# Altium PCB FoxSky.TractorVCU.PcbDoc
Units mm, origin at the board's own origin, x right, y up, seen from the top; angles counter-clockwise.
Board outline 79.93 x 48.25 mm, 2 copper layers (Top Layer, Bottom Layer); 110 components, 51 nets, 282 pads, 447 vias.
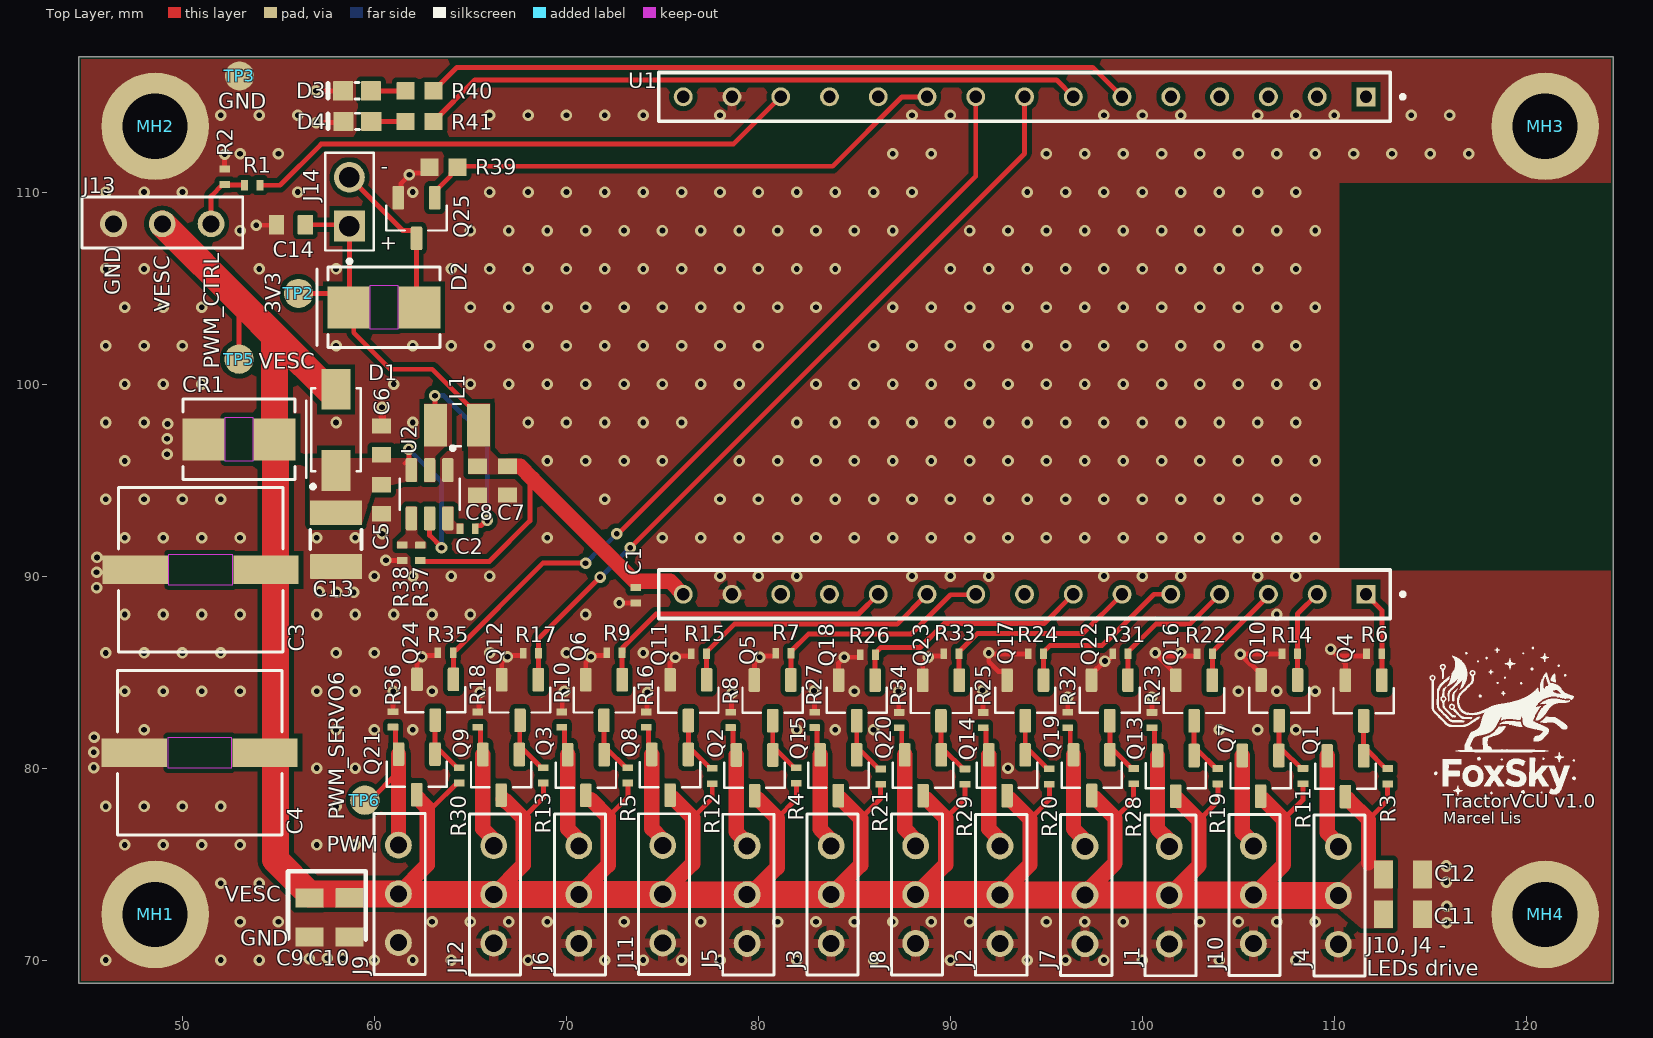
[diagram p0: Top Layer view]
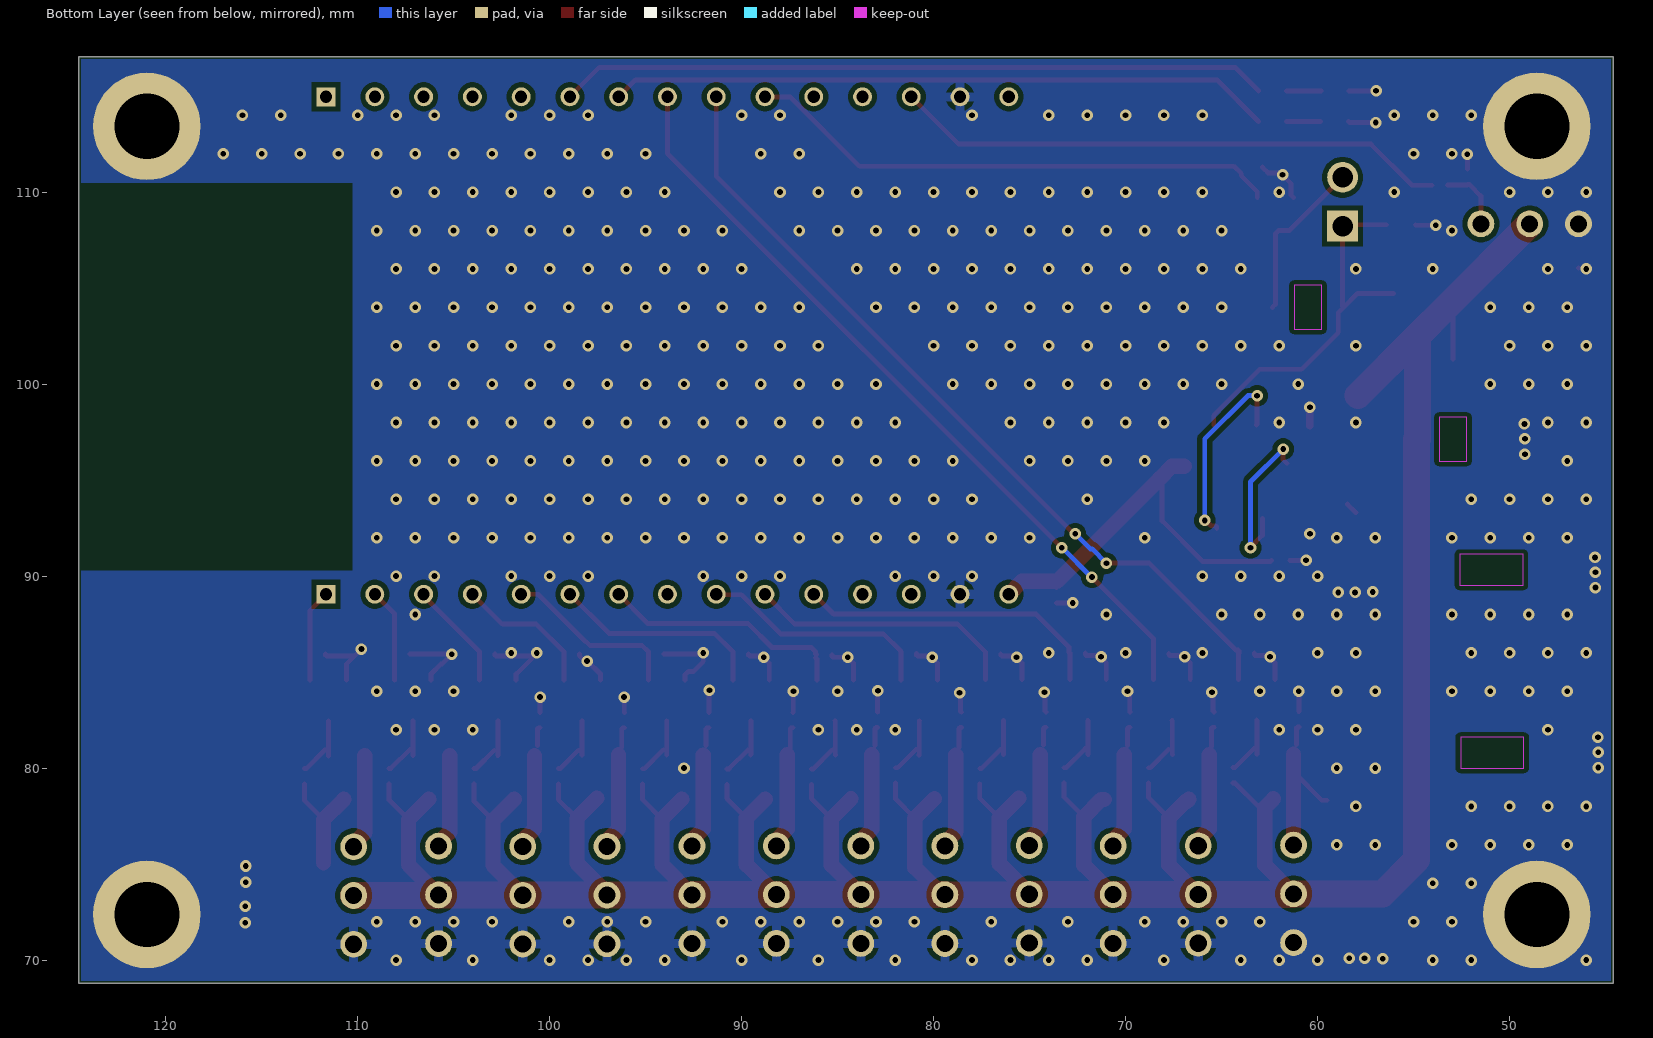
[diagram p1: Bottom Layer view, seen from below]
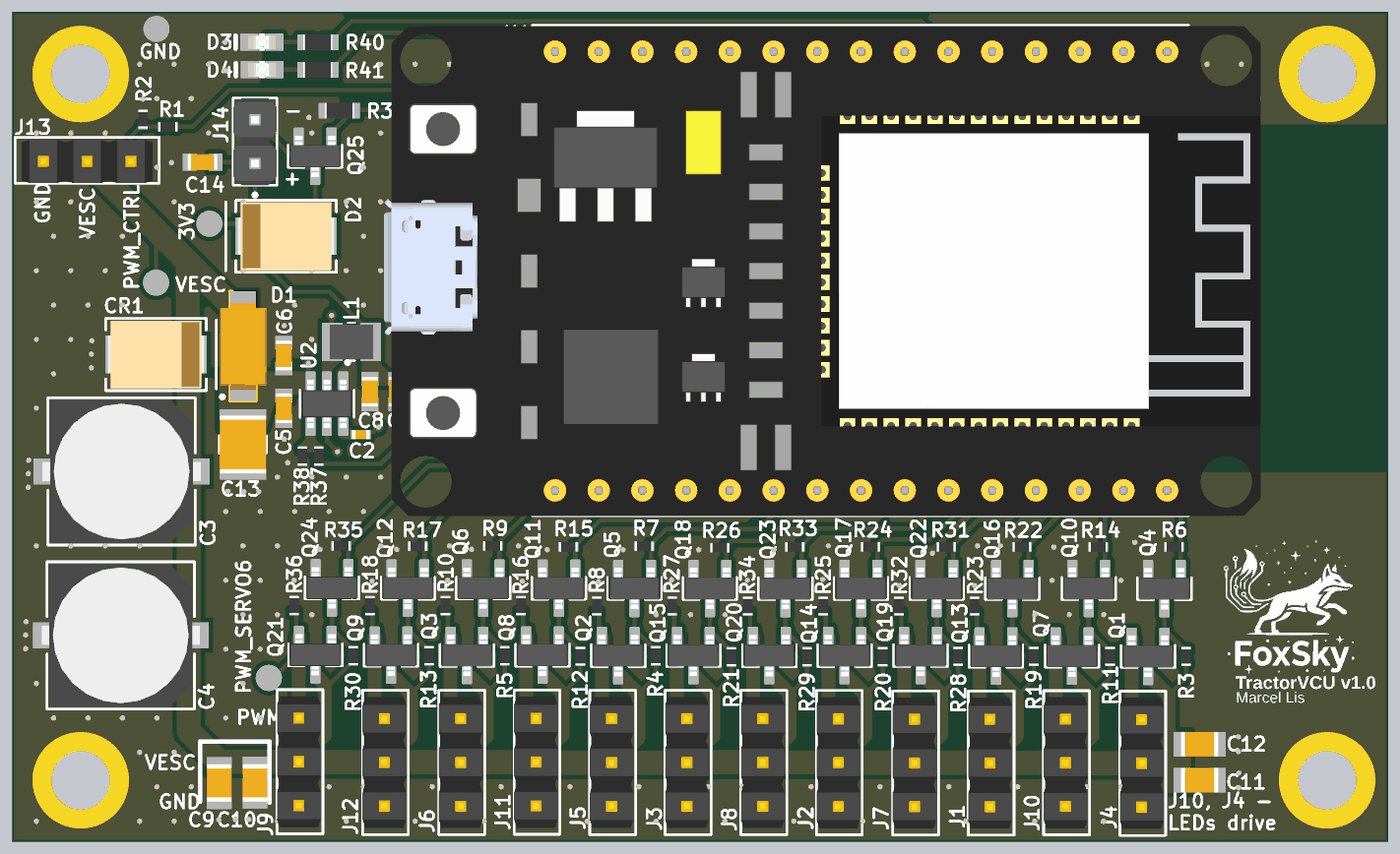
[diagram p2: 3D render of the assembled board from above, using the file's embedded part models]

## Layer stack, top to bottom
Top Solder: solder mask 0.0102, Solder Resist, Dk 3.5
Top Layer: signal copper 0.0356
Dielectric 1: dielectric 0.32, FR-4, Dk 4.8
Bottom Layer: signal copper 0.0356
Bottom Solder: solder mask 0.0102, Solder Resist, Dk 3.5

## Board outline
44.6,68.8 44.6,117.05 124.525,117.05 124.525,68.8

## Design rules (kind name [scope] priority, off if disabled: settings)
Clearance [All] p1: gap=0.254 ignorepadtopadclearanceinfootprint=FALSE
PolygonConnect GND_Reflief [InNet('GND') and (InComponent('U1') or InComponent('J2') or InComponent('J12') or InComponent('J6') or InComponent('J11') or InComponent('J5') or InComponent('J3') or InComponent('J8') or InComponent('J2') or InComponent('J7') or InComponent('J1') or InComponent('J10') or InComponent('J4'))] p1: thpad.connectstyle=Relief thpad.reliefconductorwidth=0.5 thpad.reliefentries=4 thpad.polygonreliefangle="90 Angle" thpad.airgapwidth=0.254 smdpad.connectstyle=Relief smdpad.reliefconductorwidth=0.254 smdpad.reliefentries=4 smdpad.polygonreliefangle="90 Angle" smdpad.airgapwidth=0.254 via.connectstyle=Relief via.reliefconductorwidth=0.254 via.reliefentries=4 via.polygonreliefangle="90 Angle" via.airgapwidth=0.254
PolygonConnect [All] p2: connectstyle=Direct reliefconductorwidth=0.254 reliefentries=4 polygonreliefangle="90 Angle" airgapwidth=0.254
RoutingVias [All] p1: holewidth=0.3 width=0.6 viastyle="Through Hole" minholewidth=0.3 minwidth=0.6 maxholewidth=0.4 maxwidth=0.8
SolderMaskExpansion ViaTenting [IsVia] p1: expansion=0 istentingtop=TRUE
SolderMaskExpansion [All] p2: expansion=0 istentingtop=FALSE
SupplyNets "Schematic Supply Nets_3" [InNet('+3V3')] p1: voltage=0.000
SupplyNets "Schematic Supply Nets_2" [InNet('+V_ESC')] p2: voltage=0.000
SupplyNets "Schematic Supply Nets_1" [InNet('GND')] p3: voltage=0.000
SupplyNets "Schematic Supply Nets" [InNet('+V_BUCK')] p4: voltage=0.000
Width [All] p1: maxlimit=0.254 minlimit=0.254 preferedwidth=0.254
30 further rules are at their usual default settings.

## Classes and differential pairs
component class Tractor2000: J1 J2 J3 J4 J5 J6 J7 J8 J9 J10 J11 J12 J13 MH1 MH2 MH3 MH4
component class Designator: Q1 Q2 Q3 Q4 Q5 Q6 Q7 Q8 Q9 Q10 Q11 Q12 Q13 Q14 Q15 Q16 Q17 Q18 Q19 Q20 Q21 Q22 Q23 Q24 R3 R4 R5 R6 R7 R8 R9 R10 R11 R12 R13 R14 R15 R16 R17 R18 R19 R20 R21 R22 R23 R24 R25 R26 R27 R28 R29 R30 R31 R32 R33 R34 R35 R36 TP2

## Components (designator, comment, footprint, x,y, rotation, side; value= is the part's Value field where it differs from the comment)
C1 "100n" C0402 73.6,89 r90 top
C2 "100n" C0402 64.85,92.475 r180 top
C3 "220u" CAP_PC_8X10_NCH 50.95,90.325 r180 top
C4 "220u" CAP_PC_8X10_NCH 50.9,80.8 r180 top
C5 "10u" C0603 60.373,94 r90 top
C6 "100n" C0603 60.375,97.065 r270 top
C7 "22u" C0603 66.938,94.972 r90 top
C8 "22u" C0603 65.375,94.965 r90 top
C9 "10u" C0805 56.616,72.221 r90 top
C10 "10u" C0805 58.7,72.225 r90 top
C11 "10u" C0805 113.57,72.383 r180 top
C12 "10u" C0805 113.573,74.464 r180 top
C13 "47u" C1210 58,91.9 r90 top
C14 "1u" C0603 55.65,108.3 r0 top
CR1 "SMBJ7.0A" SMBJSERIES_LTF 52.95,97.125 r180 top
D1 "SS14" DIOM4325X250N 58,97.615 r90 top
D2 "1N4148WT" SMBJSERIES_LTF 60.5,104 r0 top
D3 "LED0603" LED0603 59.096,115.275 r0 top
D4 "LED0603" LED0603 59.11,113.682 r0 top
J1 "HTSW-103-24-T-S" CON3_1X3_TU_TSW_SAI 101.4,73.375 r270 top
J2 "HTSW-103-24-T-S" CON3_1X3_TU_TSW_SAI 92.582,73.399 r270 top
J3 "HTSW-103-24-T-S" CON3_1X3_TU_TSW_SAI 83.791,73.407 r270 top
J4 "HTSW-103-24-T-S" CON3_1X3_TU_TSW_SAI 110.206,73.363 r270 top
J5 "HTSW-103-24-T-S" CON3_1X3_TU_TSW_SAI 79.413,73.405 r270 top
J6 "HTSW-103-24-T-S" CON3_1X3_TU_TSW_SAI 70.646,73.41 r270 top
J7 "HTSW-103-24-T-S" CON3_1X3_TU_TSW_SAI 97.012,73.386 r270 top
J8 "HTSW-103-24-T-S" CON3_1X3_TU_TSW_SAI 88.192,73.41 r270 top
J9 "HTSW-103-24-T-S" CON3_1X3_TU_TSW_SAI 61.25,73.45 r270 top
J10 "HTSW-103-24-T-S" CON3_1X3_TU_TSW_SAI 105.78,73.394 r270 top
J11 "HTSW-103-24-T-S" CON3_1X3_TU_TSW_SAI 75.016,73.429 r270 top
J12 "HTSW-103-24-T-S" CON3_1X3_TU_TSW_SAI 66.216,73.415 r270 top
J13 "HTSW-103-24-T-S" CON3_1X3_TU_TSW_SAI 48.95,108.35 r0 top
J14 "GoldPin 2x1" HARWIN_M20-9990246 58.7,109.5 r90 top
L1 "MAMK2520T3R3M" INDC2520X120N 64.3,97.865 r0 top
MH1 "M3 Plated Hole" "M3 Plated Hole" 48.575,72.375 r0 top
MH2 "M3 Plated Hole" "M3 Plated Hole" 48.575,113.425 r0 top
MH3 "M3 Plated Hole" "M3 Plated Hole" 120.975,113.425 r0 top
MH4 "M3 Plated Hole" "M3 Plated Hole" 120.975,72.375 r0 top
Q1 "AO3401" SOT95P240X111-3N 110.575,79.575 r270 top
Q2 "AO3401" SOT95P240X111-3N 79.799,79.623 r270 top
Q3 "AO3401" SOT95P240X111-3N 71.012,79.636 r270 top
Q4 "BSS138" SOT95P240X111-3N 111.525,83.515 r270 top
Q5 "BSS138" SOT95P240X111-3N 80.743,83.528 r270 top
Q6 "BSS138" SOT95P240X111-3N 71.955,83.546 r270 top
Q7 "AO3401" SOT95P240X111-3N 106.16,79.595 r270 top
Q8 "AO3401" SOT95P240X111-3N 75.4,79.65 r270 top
Q9 "AO3401" SOT95P240X111-3N 66.601,79.647 r270 top
Q10 "BSS138" SOT95P240X111-3N 107.13,83.526 r270 top
Q11 "BSS138" SOT95P240X111-3N 76.352,83.538 r270 top
Q12 "BSS138" SOT95P240X111-3N 67.583,83.544 r270 top
Q13 "AO3401" SOT95P240X111-3N 101.74,79.593 r270 top
Q14 "AO3401" SOT95P240X111-3N 92.95,79.625 r270 top
Q15 "AO3401" SOT95P240X111-3N 84.167,79.628 r270 top
Q16 "BSS138" SOT95P240X111-3N 102.692,83.52 r270 top
Q17 "BSS138" SOT95P240X111-3N 93.9,83.525 r270 top
Q18 "BSS138" SOT95P240X111-3N 85.126,83.524 r270 top
Q19 "AO3401" SOT95P240X111-3N 97.362,79.63 r270 top
Q20 "AO3401" SOT95P240X111-3N 88.577,79.626 r270 top
Q21 "AO3401" SOT95P240X111-3N 62.205,79.671 r270 top
Q22 "BSS138" SOT95P240X111-3N 98.3,83.525 r270 top
Q23 "BSS138" SOT95P240X111-3N 89.511,83.519 r270 top
Q24 "BSS138" SOT95P240X111-3N 63.167,83.56 r270 top
Q25 "BSS138" SOT95P240X111-3N 62.191,108.65 r270 top
R1 "1k" R0402 53.636,110.361 r180 top
R2 "10k" R0402 52.2,110.8 r270 top
R3 "2k2" R0402 112.775,79.575 r270 top
R4 "2k2" R0402 81.977,79.615 r270 top
R5 "2k2" R0402 73.204,79.618 r270 top
R6 "10k" R0402 112.075,85.95 r0 top
R7 "10k" R0402 81.3,85.975 r0 top
R8 "10k" R0402 78.549,82.508 r270 top
R9 "10k" R0402 72.5,86 r0 top
R10 "10k" R0402 69.767,82.524 r270 top
R11 "2k2" R0402 108.367,79.581 r270 top
R12 "2k2" R0402 77.597,79.584 r270 top
R13 "2k2" R0402 68.804,79.619 r270 top
R14 "10k" R0402 107.675,85.95 r0 top
R15 "10k" R0402 76.9,85.95 r0 top
R16 "10k" R0402 74.15,82.525 r270 top
R17 "10k" R0402 68.15,85.975 r0 top
R18 "10k" R0402 65.38,82.526 r270 top
R19 "2k2" R0402 103.936,79.576 r270 top
R20 "2k2" R0402 95.156,79.565 r270 top
R21 "2k2" R0402 86.367,79.552 r270 top
R22 "10k" R0402 103.25,85.95 r0 top
R23 "10k" R0402 100.5,82.5 r270 top
R24 "10k" R0402 94.45,85.95 r0 top
R25 "10k" R0402 91.706,82.499 r270 top
R26 "10k" R0402 85.7,85.9 r0 top
R27 "10k" R0402 82.925,82.509 r270 top
R28 "2k2" R0402 99.543,79.58 r270 top
R29 "2k2" R0402 90.76,79.556 r270 top
R30 "2k2" R0402 64.407,79.621 r270 top
R31 "10k" R0402 98.85,85.95 r0 top
R32 "10k" R0402 96.103,82.503 r270 top
R33 "10k" R0402 90.05,85.95 r0 top
R34 "10k" R0402 87.325,82.5 r270 top
R35 "10k" R0402 63.7,86 r0 top
R36 "10k" R0402 60.968,82.537 r270 top
R37 "33k" R0402 62.398,91.214 r270 top
R38 "10k" R0402 61.45,91.215 r90 top
R39 "10k" R0603 63.6,111.3 r0 top
R40 "330R" R0603 62.35,115.275 r0 top
R41 "330R" R0603 62.35,113.677 r0 top
TP2 "TP" TP 56.05,104.725 r90 top
TP3 "TP" TP 52.975,116.05 r90 top
TP5 "TP" TP 52.95,101.3 r90 top
TP6 "TP" TP 59.5,78.325 r90 top
U1 "NodeMCU-32" NODEMCU-32 92.325,101.625 r270 top
U2 "TPS562201DDCR" SOT95P280X110-6N 62.875,94.265 r270 top

## Footprints (in the part's own frame and the unit in brackets; to place one, negate y for a bottom-side part, rotate by r counter-clockwise, add the part's x,y. Pads: shape width x height; smd on the part's side, far side on the other; paste and mask are expansions set on the pad)
C0402 [mm] "Generic 0402 SMD Ceramic Capacitor Footprint"
  rrect5% 0.355x0.55 smd: 1(-0.4,0) 2(0.4,0)
  body extent -0.53,-0.28 0.53,0.28, height 0.55
C0603 [mm] "Generic 0603 SMD Ceramic Capacitor Footprint"
  rrect5% 0.8x1 smd: 1(-0.75,0) 2(0.75,0)
  body extent -0.87,-0.48 0.87,0.48, height 0.95
C0805 [mm] "Generic 0805 SMD Ceramic Capacitor Footprint"
  rrect5% 1x1.45 smd: 1(-1.016,0) 2(1.016,0)
  body extent -1.1,-0.72 1.1,0.72, height 1.45
C1210 [mm] "Generic 1210 SMD Ceramic Capcitor Footprint"
  rrect5% 1.3x2.7 smd: 1(-1.4,0) 2(1.4,0)
  silkscreen extent -0.5,-1.33 0.5,1.34, body extent -1.7,-1.35 1.7,1.35, height 2.8
CAP_PC_8X10_NCH [mil]
  rect 134x59 smd paste+0 mask+0: 1(-134,0) 2(134,0)
  Keep-Out Layer region: -65,-31.5 -65,31.5 65,31.5 65,-31.5
  silkscreen extent -169,-169 169,169, body extent -181,-164 181,164, height 396
CON3_1X3_TU_TSW_SAI [mil]
  round 55 hole 35 paste-99999 mask+0: 1(-100,0) 2(0,0) 3(100,0)
  silkscreen extent -165,-50 165,55, body extent -150,-50 150,50, height 500
DIOM4325X250N [mm]
  rect 2.12x1.5 smd paste+0 mask+0.102: A(2.115,0) C(-2.115,0)
  silkscreen extent -3.05,-1.28 2.16,1.3, body extent -2.56,-1.36 2.49,1.34, height 2.37
HARWIN_M20-9990246 [mm]
  rect 1.605x1.605 / inner round 1.605 / far side rect 1.605x1.605 hole 1.07: 1(-1.27,0)
  round 1.605 hole 1.07: 2(1.27,0)
  silkscreen extent -3.2,-1.27 2.54,1.27, body extent -2.54,-1.27 2.54,1.27, height 8.74
INDC2520X120N [mm]
  rect 1.2x2.22 smd: 1(-1.11,0) 2(1.11,0)
  silkscreen extent -0.19,-1.1 0.19,1.1, body extent -1.25,-1 1.25,1, height 1.2
LED0603 [mm] "0603 LED footprint"
  rrect5% 1.05x1 smd: A(0.725,0) K(-0.725,0)
  silkscreen extent -1.52,-0.42 0.11,0.43, body extent -0.81,-0.41 0.81,0.41, height 0.95
"M3 Plated Hole" [mm]
  round 5.6 hole 3.4 mask+0: 1(0,0)
NODEMCU-32 [mm]
  rect 0.985x0.985 / inner round 0.985 / far side rect 0.985x0.985 hole 0.635: 01(-13.339,19.318) 16(12.571,19.318)
  round 0.985 hole 0.635: 02(-13.339,16.778) 03(-13.339,14.238) 04(-13.339,11.698) 05(-13.339,9.158) 06(-13.339,6.618) 07(-13.339,4.078) 08(-13.339,1.538) 09(-13.339,-1.002) 10(-13.339,-3.542) 11(-13.339,-6.082) 12(-13.339,-8.622) 13(-13.339,-11.162) 14(-13.339,-13.702) 15(-13.339,-16.242) 17(12.571,16.778) 18(12.571,14.238) 19(12.571,11.698) 20(12.571,9.158) 21(12.571,6.618) 22(12.571,4.078) 23(12.571,1.538) 24(12.571,-1.002) 25(12.571,-3.542) 26(12.571,-6.082) 27(12.571,-8.622) 28(12.571,-11.162) 29(12.571,-13.702) 30(12.571,-16.242)
  silkscreen extent -14.61,-17.51 13.84,21.34, body extent -14.6,-26.13 13.9,24.8, height 6.8
R0402 [mm] "Generic 0402 Resistor Footprint"
  rrect5% 0.35x0.55 smd: 1(-0.4,0) 2(0.4,0)
  body extent -0.53,-0.28 0.53,0.28, height 0.37
R0603 [mm] "Generic 0603 Resistor Footprint"
  rrect5% 0.95x0.9 smd: 1(-0.725,0) 2(0.725,0)
  body extent -0.85,-0.45 0.85,0.45, height 0.55
SMBJSERIES_LTF [mil]
  rect 86x86 smd paste+0 mask+0: 1(-73,0) 2(73,0)
  Keep-Out Layer region: -28,-45 -28,45 28,45 28,-45
  silkscreen extent -138,-83 115,83, body extent -110,-77 110,77, height 98
SOT95P240X111-3N [mm]
  rrect25% 1.23x0.6 smd: 1(-1.06,0.95) 2(-1.06,-0.95) 3(1.06,0)
  silkscreen extent -0.65,-1.57 0.65,1.57, body extent -1.2,-1.45 1.2,1.45, height 1.11
SOT95P280X110-6N [mm]
  rrect25% 1.25x0.59 smd: 1(-1.255,0.95) 2(-1.255,0) 3(-1.255,-0.95) 4(1.255,-0.95) 5(1.255,0) 6(1.255,0.95)
  silkscreen extent -2.5,-1.57 0.8,1.57, body extent -1.4,-1.45 1.4,1.45, height 1.1
TP [mil]
  round 60 smd: 1(0,0)

## Part data
C1 C2: library part CMP-00023-15, "Generic SMD 0402 Ceramic Capacitor"
C3 C4: library part PCJ1C221MCL4GS, "No Description Available", Manufacturer_Name=Nichicon, Copyright="Copyright (C) 2026 Ultra Librarian. All rights reserved.", Manufacturer_Part_Number=PCJ1C221MCL4GS
C5 C6 C7 C8 C14: library part CMP-00024-8, "Generic 0603 SMD Ceramic Capacitor"
C9 C10 C11 C12: library part CMP-00025-5, "Generic 0805 SMD Ceramic Capacitor"
C13: library part CMP-00027-6, "Generic 1210 SMD Ceramic Capacitor"
CR1: "Description", Manufacturer_Name="Littelfuse Inc", Copyright="Copyright (C) 2025 Ultra Librarian. All rights reserved.", Manufacturer_Part_Number=SMBJ7.0A
D1: "1A, 40V, Schottky Rectifier", Package="SMA-2 Taiwan Semiconductor", Check_prices=https://www.snapeda.com/parts/SS14/taiwan/view-part/?ref=eda, MF="Taiwan Semiconductor", MP=SS14, SnapEDA_Link=https://www.snapeda.com/parts/SS14/taiwan/view-part/?ref=snap
D2: "Description", Manufacturer_Name="Littelfuse Inc", Manufacturer_Part_Number=SMBJ7.0A, Copyright="Copyright (C) 2025 Ultra Librarian. All rights reserved."
D3 D4: library part CMP-00036-7, "0603 LED"
J1 J2 J3 J4 J5 J6 J7 J8 J9 J10 J11 J12 J13: "Description", Manufacturer_Name="Samtec Inc", Copyright="Copyright (C) 2026 Ultra Librarian. All rights reserved.", Manufacturer_Part_Number=HTSW-103-24-T-S, RefDes=RefDes, Type=Type
J14: "2.54mm (0.1) Pitch SIL Vertical Throughboard Pin Header, 6.1mm mating pin height, tin, 2 contacts", Package=None, Check_prices=https://www.snapeda.com/parts/M20-9990246/Harwin/view-part/?ref=eda, MF=Harwin, MP=M20-9990246, SnapEDA_Link=https://www.snapeda.com/parts/M20-9990246/Harwin/view-part/?ref=snap
L1: "3.3 ÂµH Shielded Drum Core, Wirewound Inductor 1.7 A 156mOhm Max 1008 (2520 Metric)", Package="2520 Taiyo Yuden", Check_prices=https://www.snapeda.com/parts/MAMK2520T3R3M/Taiyo+Yuden/view-part/?ref=eda, MF="Taiyo Yuden", MP=MAMK2520T3R3M, SnapEDA_Link=https://www.snapeda.com/parts/MAMK2520T3R3M/Taiyo+Yuden/view-part/?ref=snap
MH1 MH2 MH3 MH4: library part CONN-00039-2
Q1 Q2 Q3 Q7 Q8 Q9 Q13 Q14 Q15 Q19 Q20 Q21: "P-Channel 30 V 4A Surface Mount SOT-23-3", Package="SOT-23-3 ON Semiconductor", Check_prices=https://www.snapeda.com/parts/BSS138/Onsemi/view-part/?ref=eda, MF=onsemi, MP=BSS138, SnapEDA_Link=https://www.snapeda.com/parts/BSS138/Onsemi/view-part/?ref=snap
Q4 Q5 Q6 Q10 Q11 Q12 Q16 Q17 Q18 Q22 Q23 Q24 Q25: "N-Channel 50 V 220mA (Ta) 350mW (Ta) Surface Mount SOT-23-3", Package="SOT-23-3 ON Semiconductor", Check_prices=https://www.snapeda.com/parts/BSS138/Onsemi/view-part/?ref=eda, MF=onsemi, MP=BSS138, SnapEDA_Link=https://www.snapeda.com/parts/BSS138/Onsemi/view-part/?ref=snap
R1 R2 R3 R4 R5 R6 R7 R8 R9 R10 R11 R12 R13 R14 R15 R16 R17 R18 R19 R20 R21 R22 R23 R24 R25 R26 R27 R28 R29 R30 R31 R32 R33 R34 R35 R36 R37 R38: library part CMP-00016-11, "Generic 0402 SMD Resistor"
R39 R40 R41: library part CMP-00017-10, "Generic 0603 SMD Resistor"
U1: Package=None, Availability=Unavailable, MF="Samtec Inc.", MP=TS-115-T-A, Price=None
U2: "4.5 V to 17 V input, 2 A output, synchronous step-down converter in Eco-mode", Package="SOT-23-THN-6 Texas Instruments", Check_prices=https://www.snapeda.com/parts/TPS562201DDCR/Texas+Instruments/view-part/?ref=eda, MF="Texas Instruments", MP=TPS562201DDCR, SnapEDA_Link=https://www.snapeda.com/parts/TPS562201DDCR/Texas+Instruments/view-part/?ref=snap

## Via types
v1: diameter 0.6, hole 0.3, Top Layer to Bottom Layer, tented both sides, 447 vias

## Nets (pads, with @x,y where several pads share a name; then routed paths per layer and width w, separated by ;. In a path a pad name is that pad's centre, name@x,y a point inside that pad or via, vN(x,y) a via of type N, cw(c..) or ccw(c..) an arc to the next point about the centre after c; other vN are vias at no path point)
+3V3: C1.2 C7.2 C8.2 C14.2 D2.1 J14.1 L1.2 R37.2 TP2.1 U1.30 | length 40.5
  Top Layer w0.254: TP2.1 57.921,104.725 D2.1 ; C14.2 58.63,108.3 J14.1 58.7,104.054 D2.1 ; R37.2 62.445,90.767 65.992,90.767 68.1,92.875 68.1,94.925 68.242,95.067 ; L1.2 65.41,98.375 63.011,100.774 60.826,100.774 58.924,102.676 58.924,103.721 D2.1 ; C1.2@73.549,89.45 C1.2
  Top Layer w0.8: C7.2 67.587,95.722 68.242,95.067 73.584,89.725 75.412,89.725 U1.30
+V_BUCK: C5.2 C6.2 C13.2 D1.C U2.3 U2.5 | length 9.1
  Top Layer w0.254: C13.2 C13.2@58.45,93.75 ; 61.6,95.875 61.792,96.067 v1(61.792,96.615) ; U2.5 62.875,92.121 63.494,91.502 v1(63.494,91.476)
  Bottom Layer w0.254: v1(61.792,96.615) 63.494,94.913 v1(63.494,91.476)
+V_ESC: C3.1 C4.1 C9.2 C10.2 C11.2 C12.2 CR1.1 D1.A J1.2 J2.2 J3.2 J4.2 J5.2 J6.2 J7.2 J8.2 J9.2 J10.2 J11.2 J12.2 J13.2 Q1.3 Q2.3 Q3.3 Q7.3 Q8.3 Q9.3 Q13.3 Q14.3 Q15.3 Q19.3 Q20.3 Q21.3 R3.2 R4.2 R5.2 R11.2 R12.2 R13.2 R19.2 R20.2 R21.2 R28.2 R29.2 R30.2 TP5.1 | length 196.5
  Top Layer w0.254: TP5.1 52.95,103.725 53.262,104.038 ; D1.A@57.42,100.31 D1.A ; 62.75,77.95 63.037,77.95 64.307,79.221 R30.2 ; 67.75,77.4 68.804,78.454 R13.2 ; 72.175,77.46 73.204,78.489 R5.2 ; 76.575,77.415 77.597,78.437 R12.2 ; 80.975,77.388 81.977,78.39 R4.2 ; 85.325,77.375 86.367,78.417 R21.2 ; 89.75,77.4 90.76,78.41 R29.2 ; 94.15,77.35 95.156,78.356 R20.2 ; 98.574,77.392 99.543,78.361 R28.2 ; 102.95,77.275 103.936,78.261 R19.2 ; 107.35,77.325 108.367,78.342 R11.2 ; 111.775,77.315 112.775,78.315 R3.2
  Top Layer w0.8: J9.2 62.75,74.95 62.75,77.95 Q21.3@62.305,78.396 ; J12.2 67.75,74.949 67.75,77.4 66.878,78.272 66.801,78.272 Q9.3@66.701,78.372 ; J6.2 72.175,74.939 72.175,77.46 71.274,78.361 Q3.3@71.112,78.361 ; J11.2 75.016,73.462 76.575,75.021 76.575,77.415 Q8.3@75.558,78.432 ; J5.2 79.562,73.405 79.564,73.407 80.975,74.818 80.975,77.388 Q2.3@79.956,78.406 ; J3.2 85.325,74.941 85.325,77.375 Q15.3@84.3,78.4 ; J8.2 89.75,74.968 89.75,77.4 Q20.3@88.775,78.375 ; J2.2 94.15,74.967 94.15,77.35 Q14.3@93.125,78.375 ; J7.2 97.012,73.481 98.574,75.043 98.574,77.392 Q19.3@97.546,78.421 ; J1.2 102.95,74.926 102.95,77.275 Q13.3@101.85,78.375 ; J10.2 107.35,74.964 107.35,77.325 Q7.3@106.3,78.375 ; Q1.3@110.72,78.37 111.775,77.315 111.775,75.075
  Top Layer w1.4: J13.2 53.262,104.038 54.804,102.496 ; CR1.1 54.804,102.496 ; C4.1@54.85,80.8 54.85,75.225 56.625,73.45 J9.2 ; C4.1@54.85,80.849 CR1.1@54.85,97.125 ; D1.A@57.896,99.404 54.804,102.496 ; J9.2@61.285,73.415 J12.2 J6.2@70.641,73.415 ; J6.2 J11.2@74.998,73.41 ; J11.2@75.04,73.405 J5.2 ; J5.2 79.564,73.407 J3.2 ; J3.2@83.794,73.41 J8.2 J2.2@92.572,73.41 ; J2.2 J7.2@96.999,73.399 ; J7.2 J1.2@101.388,73.386 ; J1.2@101.418,73.394 J10.2 ; J10.2@105.811,73.363 J4.2
BACK_LIGHT: J10.1 Q7.2 | length 5
  Top Layer w0.4: J10.1 J10.1@105.78,76.097
  Top Layer w0.8: Q7.2 105.21,76.667 J10.1@105.78,76.097
BUZZER: Q25.1 R39.2 U1.10 | length 28.1
  Top Layer w0.254: Q25.1 63.141,110.025 63.977,110.861 63.977,110.977 64.3,111.3 R39.2 64.375,111.35 83.864,111.35 87.478,114.964 U1.10
FRONT_LIGHT: J4.1 Q1.2 | length 5
  Top Layer w0.4: J4.1 J4.1@110.206,76.054
  Top Layer w0.8: Q1.2 109.625,76.636 J4.1@110.206,76.054
GND: C1.1 C3.2 C4.2 C5.1 C6.1 C7.1 C8.1 C9.1 C10.1 C11.1 C12.1 C13.1 C14.1 CR1.2 D3.K D4.K J1.3 J2.3 J3.3 J4.3 J5.3 J6.3 J7.3 J8.3 J9.3 J10.3 J11.3 J12.3 J13.1 MH1.1 MH2.1 MH3.1 MH4.1 Q4.2 Q5.2 Q6.2 Q10.2 Q11.2 Q12.2 Q16.2 Q17.2 Q18.2 Q22.2 Q23.2 Q24.2 Q25.2 R2.1 R6.1 R7.1 R8.1 R9.1 R10.1 R14.1 R15.1 R16.1 R17.1 R18.1 R22.1 R23.1 R24.1 R25.1 R26.1 R27.1 R31.1 R32.1 R33.1 R34.1 R35.1 R36.1 R38.1 R39.1 TP3.1 U1.14 U1.29 U2.1 | length 53.5
  Top Layer w0.254: 46.4,106.05 46.405,106.055 ; J13.1@46.405,108.345 J13.1 ; R2.1 v1(52.2,111.975) ; v1(53.85,108.275) 54.875,108.275 C14.1 ; v1(56.95,115.274) D3.K ; v1(56.975,113.625) 58.328,113.625 D4.K ; C6.1 C6.1@60.4,97.84 ; v1(60.6,90.825) 60.605,90.82 61.445,90.82 R38.1 ; R36.1 60.971,82.94 60.971,83.996 v1(60.975,84) ; Q25.2 61.389,109.858 61.389,110.464 v1(61.825,110.9) 61.919,110.9 62.018,110.999 62.574,110.999 R39.1 ; Q24.2 62.217,85.491 62.475,85.749 v1(62.475,85.8) 62.541,85.866 63.252,85.866 63.3,85.914 R35.1 ; R18.1 65.392,82.926 65.44,82.974 65.44,83.89 v1(65.5,83.95) ; Q12.2 66.633,85.491 66.925,85.783 v1(66.925,85.8) 66.991,85.866 67.702,85.866 67.75,85.914 R17.1 ; R10.1 69.767,82.955 69.783,82.972 69.783,83.79 69.9,83.906 v1(69.9,84) ; Q6.2 71.005,85.491 71.275,85.761 v1(71.275,85.8) 71.341,85.866 72.052,85.866 72.1,85.914 R9.1 ; v1(72.75,88.6) C1.1 ; R16.1 74.187,82.963 74.187,83.912 v1(74.225,83.95) ; Q11.2 75.402,85.466 75.675,85.739 v1(75.675,85.775) 75.741,85.841 76.452,85.841 76.5,85.889 R15.1 ; R8.1 78.552,82.908 78.6,82.956 78.6,83.875 v1(78.65,83.925) ; Q5.2 79.793,85.466 80.075,85.749 v1(80.075,85.775) 80.141,85.841 80.852,85.841 80.9,85.889 R7.1 ; v1(82.9,84.025) 82.912,84.013 82.912,82.922 R27.1 ; Q18.2 84.176,85.466 84.475,85.765 v1(84.475,85.775) 85.252,85.775 85.3,85.823 R26.1 ; v1(87.3,84) 87.312,83.988 87.312,82.913 R34.1 ; Q23.2 88.561,85.466 88.85,85.755 v1(88.85,85.775) 88.916,85.841 89.602,85.841 89.65,85.889 R33.1 ; v1(91.675,84.05) 91.691,84.034 91.691,82.914 R25.1 ; Q17.2 92.95,84.863 92.777,85.036 92.499,85.036 91.995,85.54 91.995,85.895 92.05,85.95 R24.1 ; R32.1 96.114,82.914 96.114,83.689 v1(96.125,83.7) ; Q22.2 97.35,84.9 98.025,85.575 v1(98.05,85.575) 98.116,85.641 98.241,85.641 98.45,85.85 R31.1 ; R23.1 v1(100.5,83.7) ; v1(100.675,86) v1@100.834,85.841 ; Q16.2 101.742,84.895 100.834,85.803 v1@100.834,85.841 ; R22.1 102.85,85.889 102.802,85.841 v1@100.834,85.841 ; Q10.2 106.18,84.901 105.652,85.43 105.595,85.43 v1(105.1,85.925) 105.113,85.938 107.263,85.938 R14.1 ; v1(109.8,86.2) 110.159,85.841 ; Q4.2 110.575,85.425 110.159,85.841 ; R6.1 111.675,85.889 111.627,85.841 110.159,85.841
  Top Layer w0.4: C6.1@60.4,97.84 v1(60.4,98.8)
  other v1: 46,70 52,70 54,70 60,70 62,70 64,70 68,70 72,70 74,70 76,70 78,70 82,70 86,70 90,70 94,70 96,70 98,70 100,70 104,70 108,70 56.6,70.075 57.55,70.1 58.35,70.1 115.851,71.948 53,72 55,72 63,72 65,72 67,72 69,72 73,72 77,72 81,72 83,72 85,72 87,72 89,72 91,72 95,72 97,72 99,72 103,72 105,72 107,72 109,72 115.851,72.798 52,74 54,74 115.825,74.05 115.825,74.9 47,76 49,76 51,76 53,76 57,76 59,76 46,78 48,78 50,78 52,78 58,78 57,80 59,80 93,80 45.375,80.025 45.375,80.825 45.4,81.6 48,82 58,82 60,82 62,82 82,82 84,82 86,82 104,82 106,82 108,82 47,84 49,84 51,84 53,84 57,84 59,84 63,84 85,84 105,84 107,84 109,84 46,86 48,86 50,86 52,86 58,86 60,86 66,86 70,86 74,86 92,86 102,86 47,88 49,88 51,88 53,88 57,88 59,88 61,88 63,88 65,88 71,88 107,88 58.048,89.149 58.925,89.15 57.125,89.175 45.525,89.4 60,90 62,90 64,90 66,90 78,90 80,90 82,90 88,90 90,90 92,90 98,90 100,90 102,90 106,90 108,90 45.525,90.2 45.55,90.975 47,92 49,92 51,92 53,92 57,92 59,92 69,92 75,92 77,92 79,92 81,92 83,92 85,92 87,92 89,92 91,92 93,92 95,92 97,92 99,92 101,92 103,92 105,92 107,92 109,92 60.4,92.2 46,94 48,94 50,94 52,94 72,94 78,94 80,94 82,94 84,94 86,94 88,94 90,94 92,94 94,94 96,94 98,94 100,94 102,94 104,94 106,94 108,94 47,96 69,96 71,96 73,96 75,96 79,96 81,96 83,96 85,96 87,96 89,96 91,96 93,96 95,96 97,96 99,96 101,96 103,96 105,96 107,96 109,96 49.2,96.35 49.2,97.15 49.225,97.925 46,98 48,98 58,98 62,98 68,98 70,98 72,98 74,98 76,98 82,98 84,98 86,98 88,98 90,98 92,98 94,98 96,98 98,98 100,98 102,98 104,98 106,98 108,98 47,100 49,100 51,100 61,100 65,100 67,100 69,100 71,100 73,100 75,100 77,100 79,100 83,100 85,100 87,100 89,100 91,100 93,100 95,100 97,100 99,100 101,100 103,100 105,100 107,100 109,100 46,102 48,102 50,102 58,102 62,102 64,102 66,102 68,102 70,102 72,102 74,102 76,102 78,102 80,102 86,102 88,102 90,102 92,102 94,102 96,102 98,102 100,102 102,102 104,102 106,102 108,102 47,104 49,104 51,104 65,104 67,104 69,104 71,104 73,104 75,104 77,104 79,104 81,104 83,104 87,104 89,104 91,104 93,104 95,104 97,104 99,104 101,104 103,104 105,104 107,104 109,104 46,106 48,106 54,106 58,106 64,106 66,106 68,106 70,106 72,106 74,106 76,106 78,106 80,106 82,106 84,106 90,106 92,106 94,106 96,106 98,106 100,106 102,106 104,106 106,106 108,106 53,108 65,108 67,108 69,108 71,108 73,108 75,108 77,108 79,108 81,108 83,108 85,108 87,108 91,108 93,108 95,108 97,108 99,108 101,108 103,108 105,108 107,108 109,108 46,110 48,110 50,110 56,110 62,110 66,110 68,110 70,110 72,110 74,110 76,110 78,110 80,110 82,110 84,110 86,110 88,110 94,110 96,110 98,110 100,110 102,110 104,110 106,110 108,110 53,112 55,112 87,112 89,112 95,112 97,112 99,112 101,112 103,112 105,112 107,112 109,112 111,112 113,112 115,112 117,112 52,114 54,114 56,114 66,114 68,114 70,114 72,114 74,114 78,114 88,114 90,114 98,114 100,114 102,114 106,114 108,114 110,114 114,114 116,114
LED1: R40.2 U1.06 | length 37
  Top Layer w0.254: R40.2 64.3,116.5 97.407,116.5 U1.06
LED2: R41.2 U1.07 | length 34.6
  Top Layer w0.254: R41.2 65.236,115.838 95.529,115.838 U1.07
MCU_ESC_CONTROL: R1.1 U1.13 | length 29
  Top Layer w0.254: R1.1 55.083,110.361 57.223,112.5 78.699,112.5 U1.13
NetC2_1: C2.1 L1.1 U2.2 | length 10.3
  Top Layer w0.254: v1(63.15,99.399) 63.15,97.905 L1.1 ; C2.1 65.25,92.572 65.3,92.623 65.553,92.623 65.83,92.9 v1(65.875,92.9)
  Bottom Layer w0.254: v1(63.15,99.399) 63.626,99.399 65.875,97.15 v1(65.875,92.9)
NetC2_2: C2.2 U2.6
NetD2_2: D2.2 J14.2 Q25.3 | length 8.6
  Top Layer w0.254: J14.2 61.467,108.003 62.018,108.003 62.191,107.83 Q25.3 62.191,104.163 D2.2
NetD3_A: D3.A R40.1 | length 1.8
  Top Layer w0.254: D3.A R40.1
NetD4_A: D4.A R41.1 | length 1.8
  Top Layer w0.254: D4.A 59.841,113.677 R41.1
NetJ13_3: J13.3 R1.2 R2.2 | length 3.5
  Top Layer w0.254: J13.3 51.49,109.79 52.1,110.4 R2.2 52.22,110.38 53.216,110.38 R1.2
NetQ1_1: Q1.1 Q4.3 R3.1 | length 3.3
  Top Layer w0.254: Q1.1 Q4.3 ; Q1.1@111.7,80.95 112.675,79.975 R3.1
NetQ2_1: Q2.1 Q5.3 R4.1 | length 3.3
  Top Layer w0.254: Q5.3 80.746,82.465 80.746,80.686 Q2.1 Q2.1@80.758,80.675 ; Q2.1@80.908,80.983 81.877,80.015 R4.1
NetQ3_1: Q3.1 Q6.3 R5.1 | length 3.3
  Top Layer w0.254: Q6.3 71.958,82.482 71.958,80.7 Q3.1 ; Q3.1@72.111,81.011 73.104,80.018 R5.1
NetQ4_1: Q4.1 R6.2 U1.16 | length 4.8
  Top Layer w0.254: U1.16 112.475,88.222 R6.2 Q4.1
NetQ5_1: Q5.1 R7.2 U1.24 | length 12.3
  Top Layer w0.254: Q5.1 81.696,84.592 81.696,85.971 R7.2 81.7,86.075 82.6,86.975 87.95,86.975 90.004,89.029 91.298,89.029 U1.24
NetQ6_1: Q6.1 R9.2 U1.26 | length 16.2
  Top Layer w0.254: Q6.1 72.903,84.608 72.903,85.997 R9.2 72.948,86.048 72.948,86.298 74.675,88.025 85.214,88.025 U1.26
NetQ7_1: Q7.1 Q10.3 R11.1 | length 3.3
  Top Layer w0.254: Q7.1 107.12,80.665 107.12,82.456 Q10.3 ; Q7.1@107.287,80.962 108.267,79.981 R11.1
NetQ8_1: Q8.1 Q11.3 R12.1 | length 3.3
  Top Layer w0.254: Q8.1 76.351,80.711 76.351,82.477 Q11.3 ; Q8.1@76.478,81.003 77.497,79.984 R12.1
NetQ9_1: Q9.1 Q12.3 R13.1 | length 3.2
  Top Layer w0.254: Q9.1 67.567,80.723 67.567,82.468 Q12.3 ; Q9.1@67.749,80.974 68.704,80.019 R13.1
NetQ10_1: Q10.1 R14.2 U1.17 | length 4.9
  Top Layer w0.254: Q10.1 108.078,84.588 108.078,85.947 R14.2 108.075,88.026 U1.17
NetQ11_1: Q11.1 R15.2 U1.25 | length 14.1
  Top Layer w0.254: R15.2 77.301,85.949 77.301,84.599 Q11.1 ; R15.2@77.3,86.05 78.75,87.5 87.229,87.5 U1.25
NetQ12_1: Q12.1 R17.2 U1.08 | length 40.9
  Top Layer w0.254: Q12.1 68.541,84.613 68.541,85.966 R17.2 68.55,86.75 v1(71.75,89.95) ; v1(73.325,91.475) 93.863,112.013 U1.08
  Bottom Layer w0.254: v1(71.75,89.95) 71.775,89.95 73.3,91.475 v1(73.325,91.475)
NetQ13_1: Q13.1 Q16.3 R19.1 | length 3.3
  Top Layer w0.254: Q13.1 102.691,80.654 Q16.3 Q16.3 ; Q13.1@102.881,80.931 103.836,79.976 R19.1
NetQ14_1: Q14.1 Q17.3 R20.1 | length 3.3
  Top Layer w0.254: Q14.1 Q17.3 ; Q14.1@94.073,80.948 95.056,79.965 R20.1
NetQ15_1: Q15.1 Q18.3 R21.1 | length 3.3
  Top Layer w0.254: Q15.1 85.121,80.693 85.121,82.46 Q18.3 ; Q15.1@85.272,80.947 86.267,79.952 R21.1
NetQ16_1: Q16.1 R22.2 U1.18 | length 5.6
  Top Layer w0.254: Q16.1 103.646,84.583 103.646,85.946 R22.2 ; R22.2@103.65,86.05 106.563,88.963 U1.18
NetQ17_1: Q17.1 R24.2 U1.20 | length 9.3
  Top Layer w0.254: Q17.1 R24.2 94.85,86.05 95.178,86.378 97.894,86.378 98.122,86.606 98.156,86.606 100.604,89.054 U1.20
NetQ18_1: Q18.1 R26.2 U1.22 | length 12.9
  Top Layer w0.254: Q18.1 86.076,85.676 R26.2@86.15,85.75 ; R26.2 86.148,85.948 86.148,86.048 86.38,86.281 88.419,86.281 89.663,87.525 94.874,87.525 U1.22
NetQ19_1: Q19.1 Q22.3 R28.1 | length 3.2
  Top Layer w0.254: Q22.3 98.306,82.459 98.306,80.696 Q19.1 ; Q19.1@98.499,80.924 99.443,79.98 R28.1
NetQ20_1: Q20.1 Q23.3 R29.1 | length 3.3
  Top Layer w0.254: Q23.3 89.519,82.451 89.519,80.694 Q20.1 ; Q20.1@89.683,80.933 90.66,79.956 R29.1
NetQ21_1: Q21.1 Q24.3 R30.1 | length 3.3
  Top Layer w0.254: Q21.1 63.161,80.737 63.161,82.494 Q24.3 ; Q21.1@63.314,81.014 64.307,80.021 R30.1
NetQ22_1: Q22.1 R31.2 U1.19 | length 7.4
  Top Layer w0.254: Q22.1 R31.2 ; R31.2@99.25,86.05 100.7,87.5 102.469,87.5 U1.19
NetQ23_1: Q23.1 R33.2 U1.21 | length 11.1
  Top Layer w0.254: R33.2 90.455,85.945 90.455,84.584 Q23.1 ; R33.2@90.45,86.05 91.417,87.017 96.906,87.017 U1.21
NetQ24_1: Q24.1 R35.2 U1.09 | length 43.1
  Top Layer w0.254: Q24.1 64.109,84.629 64.109,85.991 R35.2 64.1,86.1 64.148,86.148 64.248,86.148 68.775,90.675 v1(71,90.675) ; v1(72.625,92.2) 72.7,92.2 91.323,110.823 U1.09
  Bottom Layer w0.254: v1(71,90.675) 71.739,91.414 71.839,91.414 v1(72.625,92.2)
NetR37_1: R37.1 R38.2 U2.4
PWM_GPIO1: J5.1 Q2.2 R8.2 | length 6.1
  Top Layer w0.254: R8.2 78.627,82.108 78.675,82.06 Q2.2@78.675,81.075
  Top Layer w0.8: Q2.2 78.845,80.679 78.845,76.674 79.413,76.107 J5.1
PWM_GPIO2: J11.1 Q8.2 R16.2 | length 6
  Top Layer w0.254: R16.2 74.227,82.125 74.275,82.077 Q8.2@74.275,81.2 ; J11.1 J11.1@75.016,76.278
  Top Layer w0.8: Q8.2 74.45,76.844 J11.1@75.016,76.278
PWM_GPIO3: J6.1 Q3.2 R10.2 | length 6
  Top Layer w0.254: R10.2 69.852,82.124 69.9,82.076 Q3.2@69.9,81.175 ; J6.1 J6.1@70.646,76.26
  Top Layer w0.8: Q3.2 70.062,76.844 J6.1@70.646,76.26
PWM_GPIO4: J12.1 Q9.2 R18.2 | length 6.1
  Top Layer w0.254: R18.2 65.468,82.126 65.516,82.078 65.516,81.128 Q9.2@65.529,81.115 ; J12.1 J12.1@66.216,76.265
  Top Layer w0.8: Q9.2 65.651,76.83 J12.1@66.216,76.265
PWM_SERVO1: J1.1 Q13.2 R23.2 | length 6
  Top Layer w0.254: R23.2 100.577,82.1 100.625,82.052 Q13.2@100.625,81.175 ; J1.1 J1.1@101.4,76.222
  Top Layer w0.8: Q13.2 100.79,76.832 J1.1@101.4,76.222
PWM_SERVO2: J7.1 Q19.2 R32.2 | length 6.2
  Top Layer w0.254: R32.2 96.195,82.103 96.243,82.055 Q19.2@96.243,81.075 ; J7.1 J7.1@97.012,76.236
  Top Layer w0.8: Q19.2 96.412,76.835 J7.1@97.012,76.236
PWM_SERVO3: J2.1 Q14.2 R25.2 | length 6
  Top Layer w0.254: R25.2 91.802,82.099 91.85,82.051 Q14.2@91.85,81.175 ; J2.1 J2.1@92.582,76.248
  Top Layer w0.8: Q14.2 92,76.831 J2.1@92.582,76.248
PWM_SERVO4: J8.1 Q20.2 R34.2 | length 6.6
  Top Layer w0.254: R34.2 87.418,82.1 87.466,82.052 87.466,80.846 Q20.2 ; J8.1 J8.1@88.192,76.259
  Top Layer w0.8: Q20.2 87.627,76.824 J8.1@88.192,76.259
PWM_SERVO5: J3.1 Q15.2 R27.2 | length 6
  Top Layer w0.254: R27.2 83.002,82.109 83.05,82.061 Q15.2@83.05,81.175 ; J3.1 J3.1@83.791,76.256
  Top Layer w0.8: Q15.2 83.217,76.83 J3.1@83.791,76.256
PWM_SERVO6: J9.1 Q21.2 R36.2 TP6.1 | length 8.1
  Top Layer w0.254: TP6.1 59.777,78.325 61.252,79.8 ; R36.2 61.052,82.137 61.1,82.089 Q21.2@61.1,81.225 ; J9.1 J9.1@61.252,75.992 ; Q21.2@61.252,80.728 Q21.2
  Top Layer w0.8: J9.1@61.252,75.992 61.252,79.8 Q21.2@61.252,80.728
pads on no net: U1.01 U1.02 U1.03 U1.04 U1.05 U1.11 U1.12 U1.15 U1.23 U1.27 U1.28

## Polygon pours and split planes (outlines as drawn)
GND on Top Layer "GND_L01_P011" (solid, remove dead copper, pour order 11): 110.25,110.5 124.4,110.5 124.4,116.925 44.725,116.925 44.725,68.925 124.4,68.925 124.4,86.5 124.4,90.275 110.25,90.275
+V_ESC on Top Layer "+V_ESC_L01_P007" (solid, pour order 7): 113.05,75.2 111.425,75.2 110.225,74 110.225,72.675 111.425,71.65 113.05,71.65
GND on Top Layer "GND_L01_P010" (solid, pour order 10): 116.25,75.2 116.25,71.65 114.075,71.65 114.075,75.2
GND on Top Layer "GND_L01_P009" (solid, pour order 9): 56.65,91.15 56.65,88.875 59.325,88.875 59.325,91.15
NetC2_2 on Top Layer "NETC2_2_L01_P008" (solid, pour order 8): 64.625,92.2 63.75,92.2 63.525,92.425 63.525,93.625 64.125,93.625 64.125,92.9 64.275,92.75 64.625,92.75
+V_BUCK on Top Layer "+V_BUCK_L01_P000" (solid, pour order 0): 59.346,92.7 59.863,94.381 60.634,94.688 61.534,94.888 62.225,94.89 62.225,96.14 56.625,96.14 56.625,92.7
NetC2_1 on Top Layer "NETC2_1_L01_P001" (solid, pour order 1): 63.175,94.89 63.175,96.24 63.7,96.765 64.025,96.765 64.025,98.965 62.6,98.965 62.6,94.89
GND on Top Layer "GND_L01_P002" (solid, pour order 2): 59.875,90.575 60.875,90.575 60.875,92.865 61.375,93.365 61.525,93.865 67.45,93.865 67.45,94.615 64.4,94.615 64.125,94.89 64.125,96.14 63.525,96.14 63.525,94.89 63.25,94.615 61.375,94.615 61.375,94.54 60.475,93.64 59.875,93.64
+3V3 on Top Layer "+3V3_L01_P003" (solid, pour order 3): 64.875,95.315 64.875,98.965 64.9,98.99 66.025,98.99 66.025,96.565 66.475,96.115 67.45,96.115 67.45,95.315
NetR37_1 on Top Layer "NETR37_1_L01_P004" (solid, pour order 4): 62.7,91.44 62.7,91.79 62.65,91.79 62.225,92.215 62.225,93.64 61.625,93.64 61.625,92.215 61.174,91.79 61.174,91.44
GND on Bottom Layer "GND_L02_P012" (solid, pour order 12): 44.725,116.925 44.725,68.925 124.4,68.925 124.4,90.275 110.275,90.275 110.25,90.25 110.25,110.5 124.4,110.5 124.4,116.925

## Silkscreen, mask and mechanical layers (free items; w line width, h text height)
Top Overlay:
  drawing of 49 lines, arcs and shapes, not listed
  text "GND" at 51.875,114.35 h0.8
  text "-" at 60.325,110.95 h0.8
  text "+" at 60.275,107 h0.8
  text "GND" at 46.75,104.625 h0.8 r90
  text "VESC" at 49.35,103.775 h0.8 r90
  text "3V3" at 55.125,103.675 h0.8 r90
  text "PWM_CTRL" at 51.917,100.8 h0.8 r90
  text "VESC" at 53.975,100.8 h0.8
  text "TractorVCU v1.0" at 115.65,77.689 h1.2
  text "PWM_SERVO6" at 58.417,77.3 h0.8 r90
  text "Marcel Lis" at 115.675,76.885 h1
  text "PWM" at 57.525,75.65 h0.8
  text "VESC" at 52.2,73.025 h0.8
  text "GND" at 53,70.75 h0.8
  text "J10, J4 -  / LEDs drive" at 111.675,69.175 h0.8
Mechanical 1:
  the board outline again, w0.254